# Altium PCB PCB4.PcbDoc
Units mm, origin at the board's own origin, x right, y up, seen from the top; angles counter-clockwise.
Board outline 55 x 45 mm, 4 copper layers (Top Layer, VCC, GND, Bottom Layer), stack 0.651 mm thick; 98 components, 82 nets, 380 pads, 168 vias.
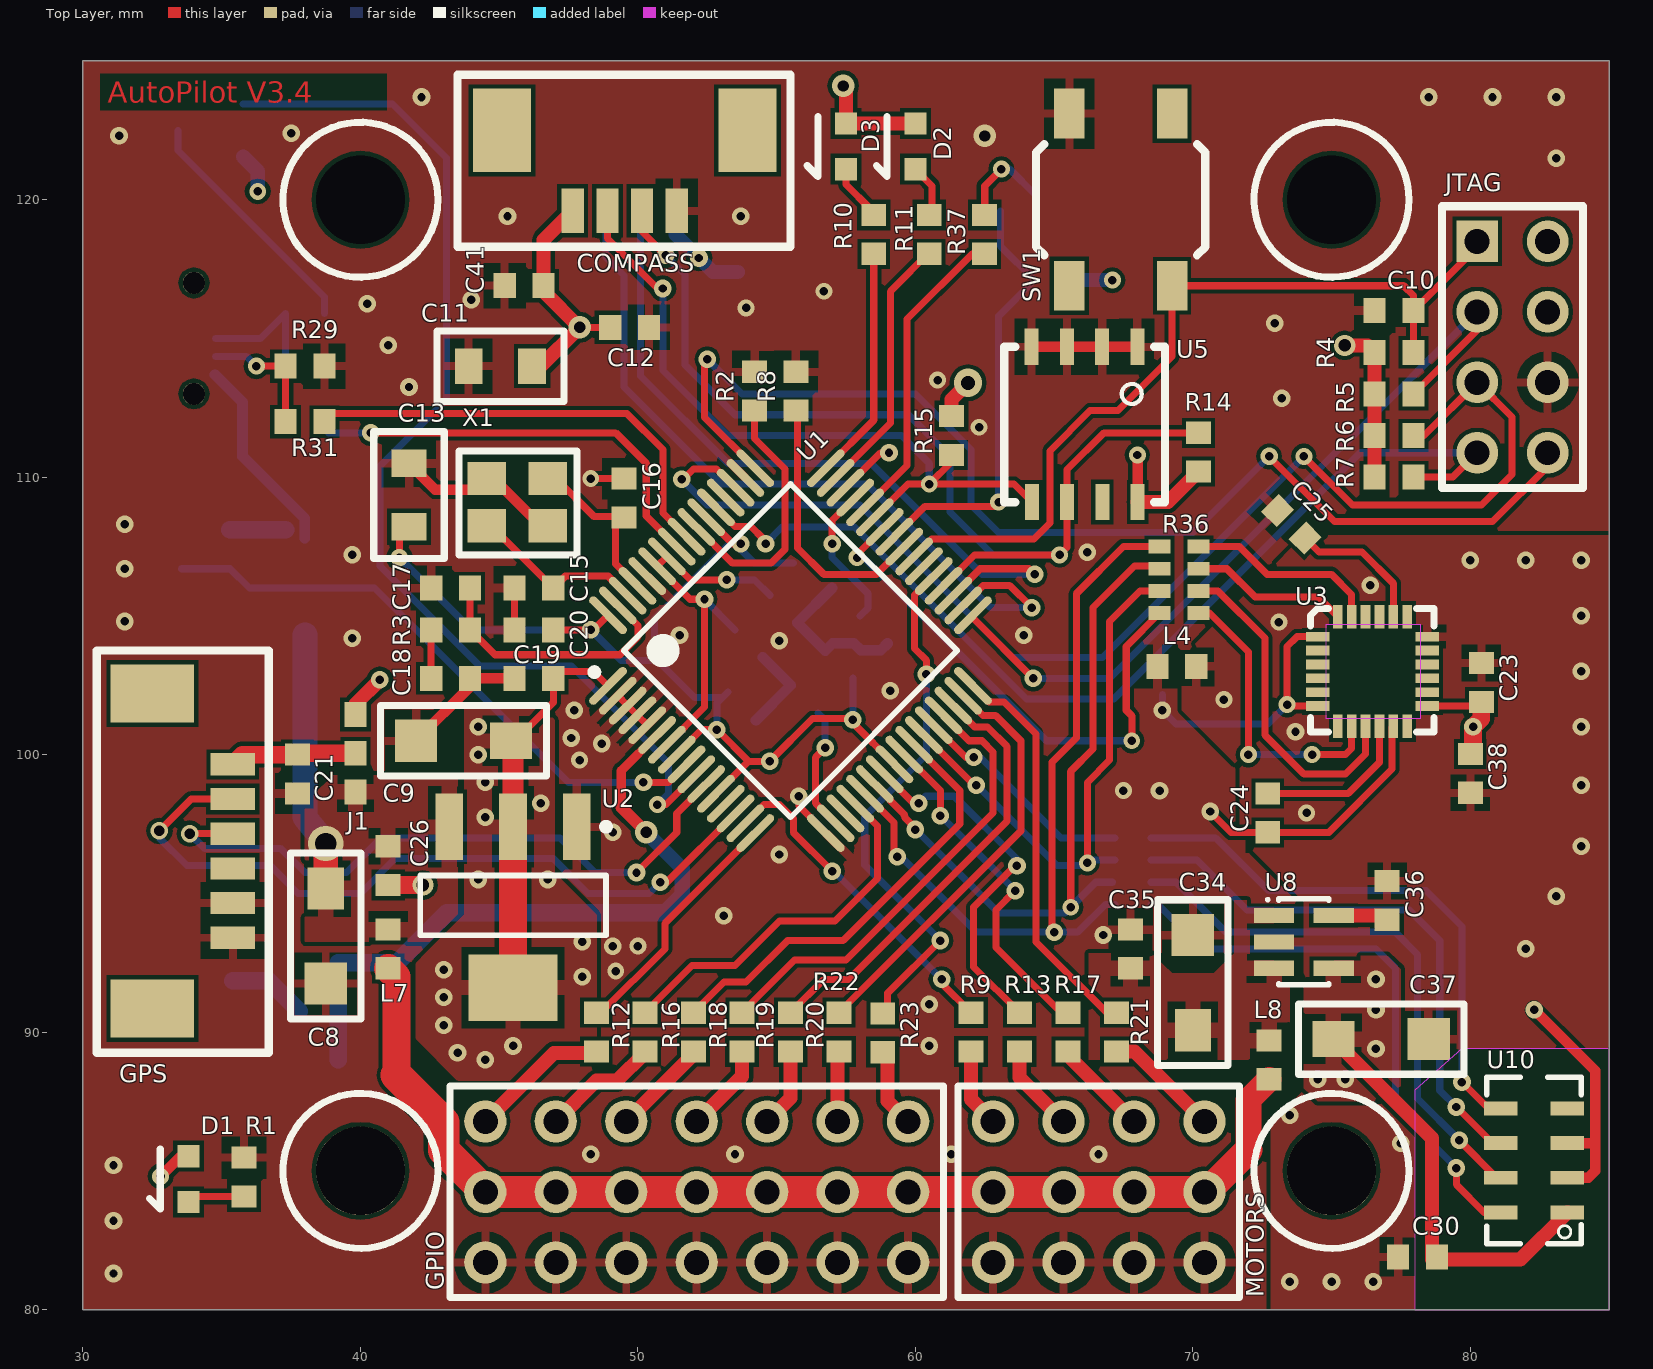
[diagram p0: Top Layer view]
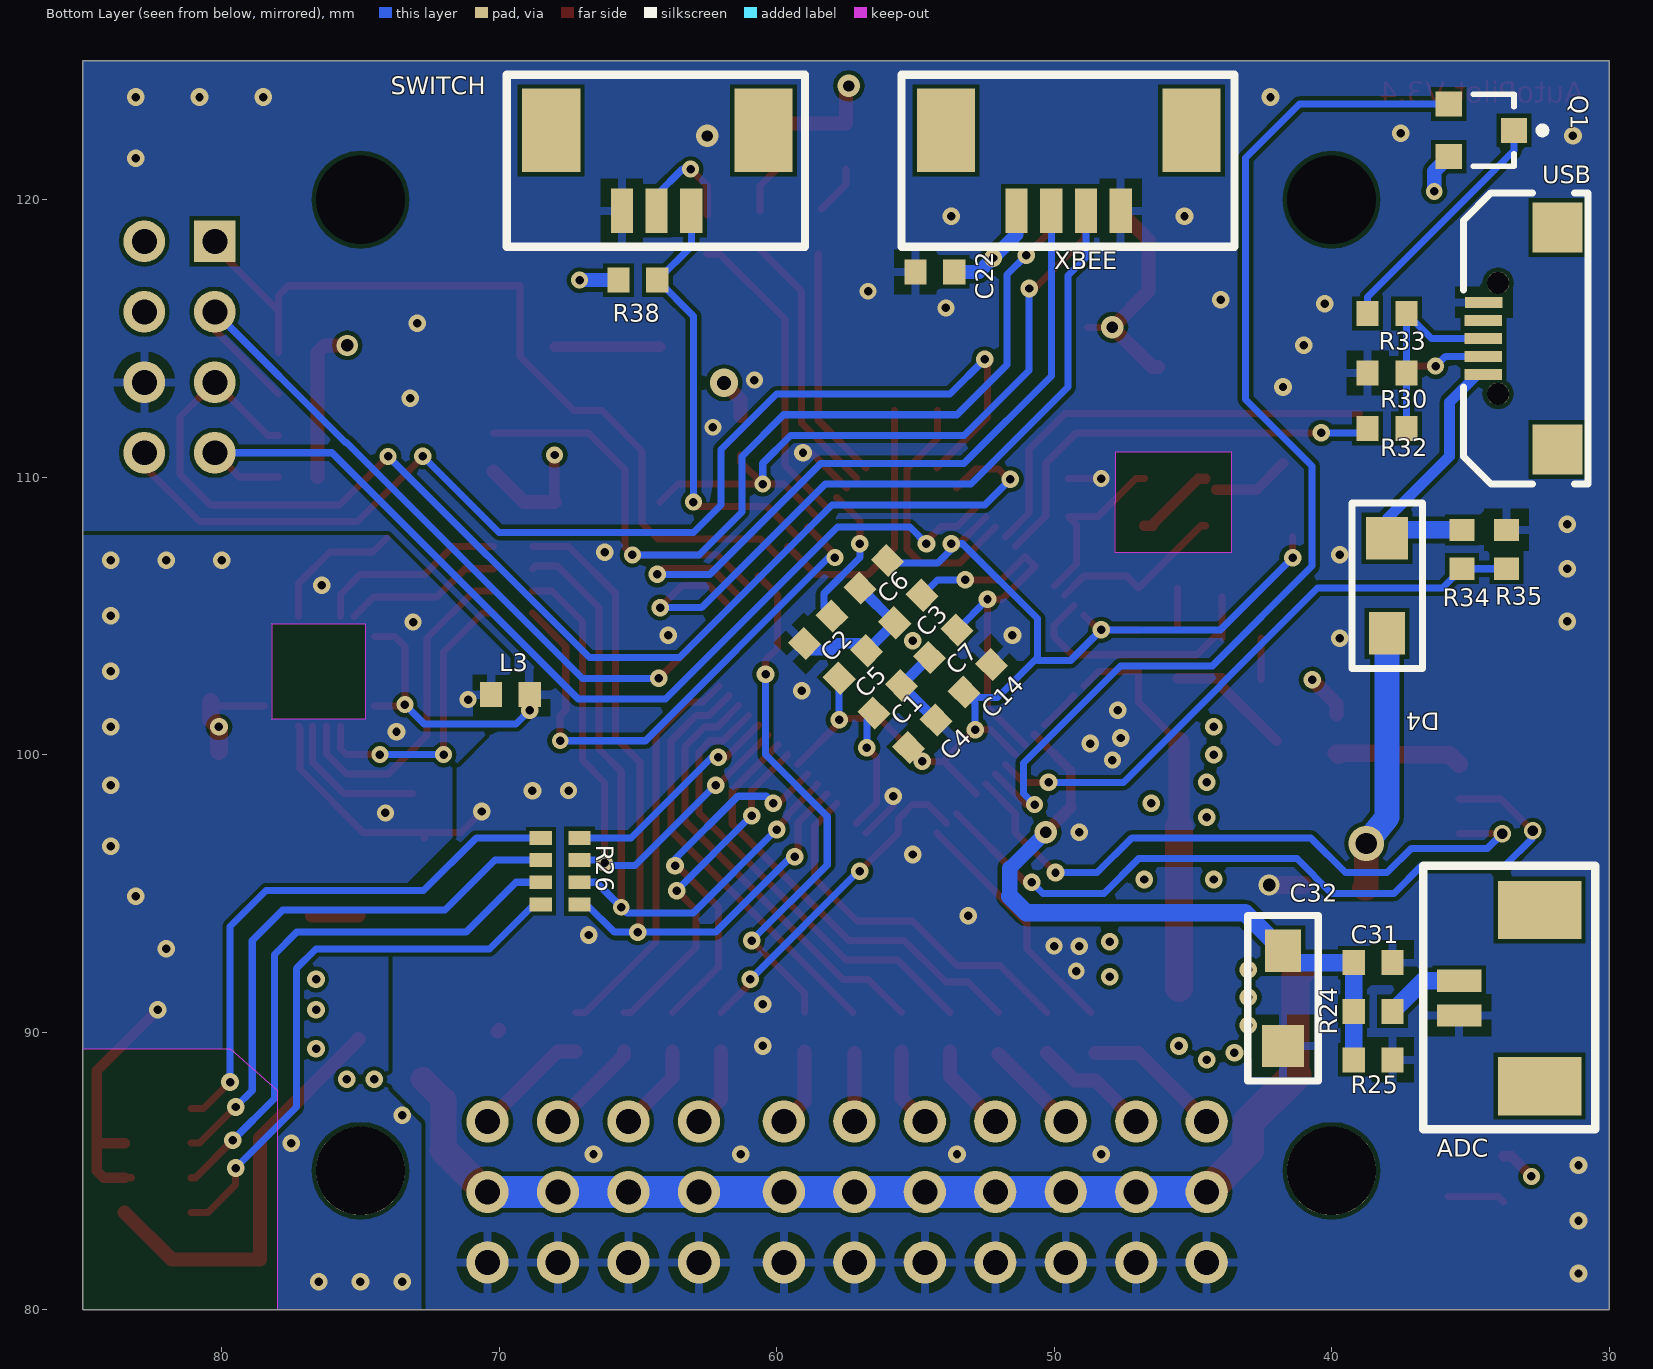
[diagram p1: Bottom Layer view, seen from below]
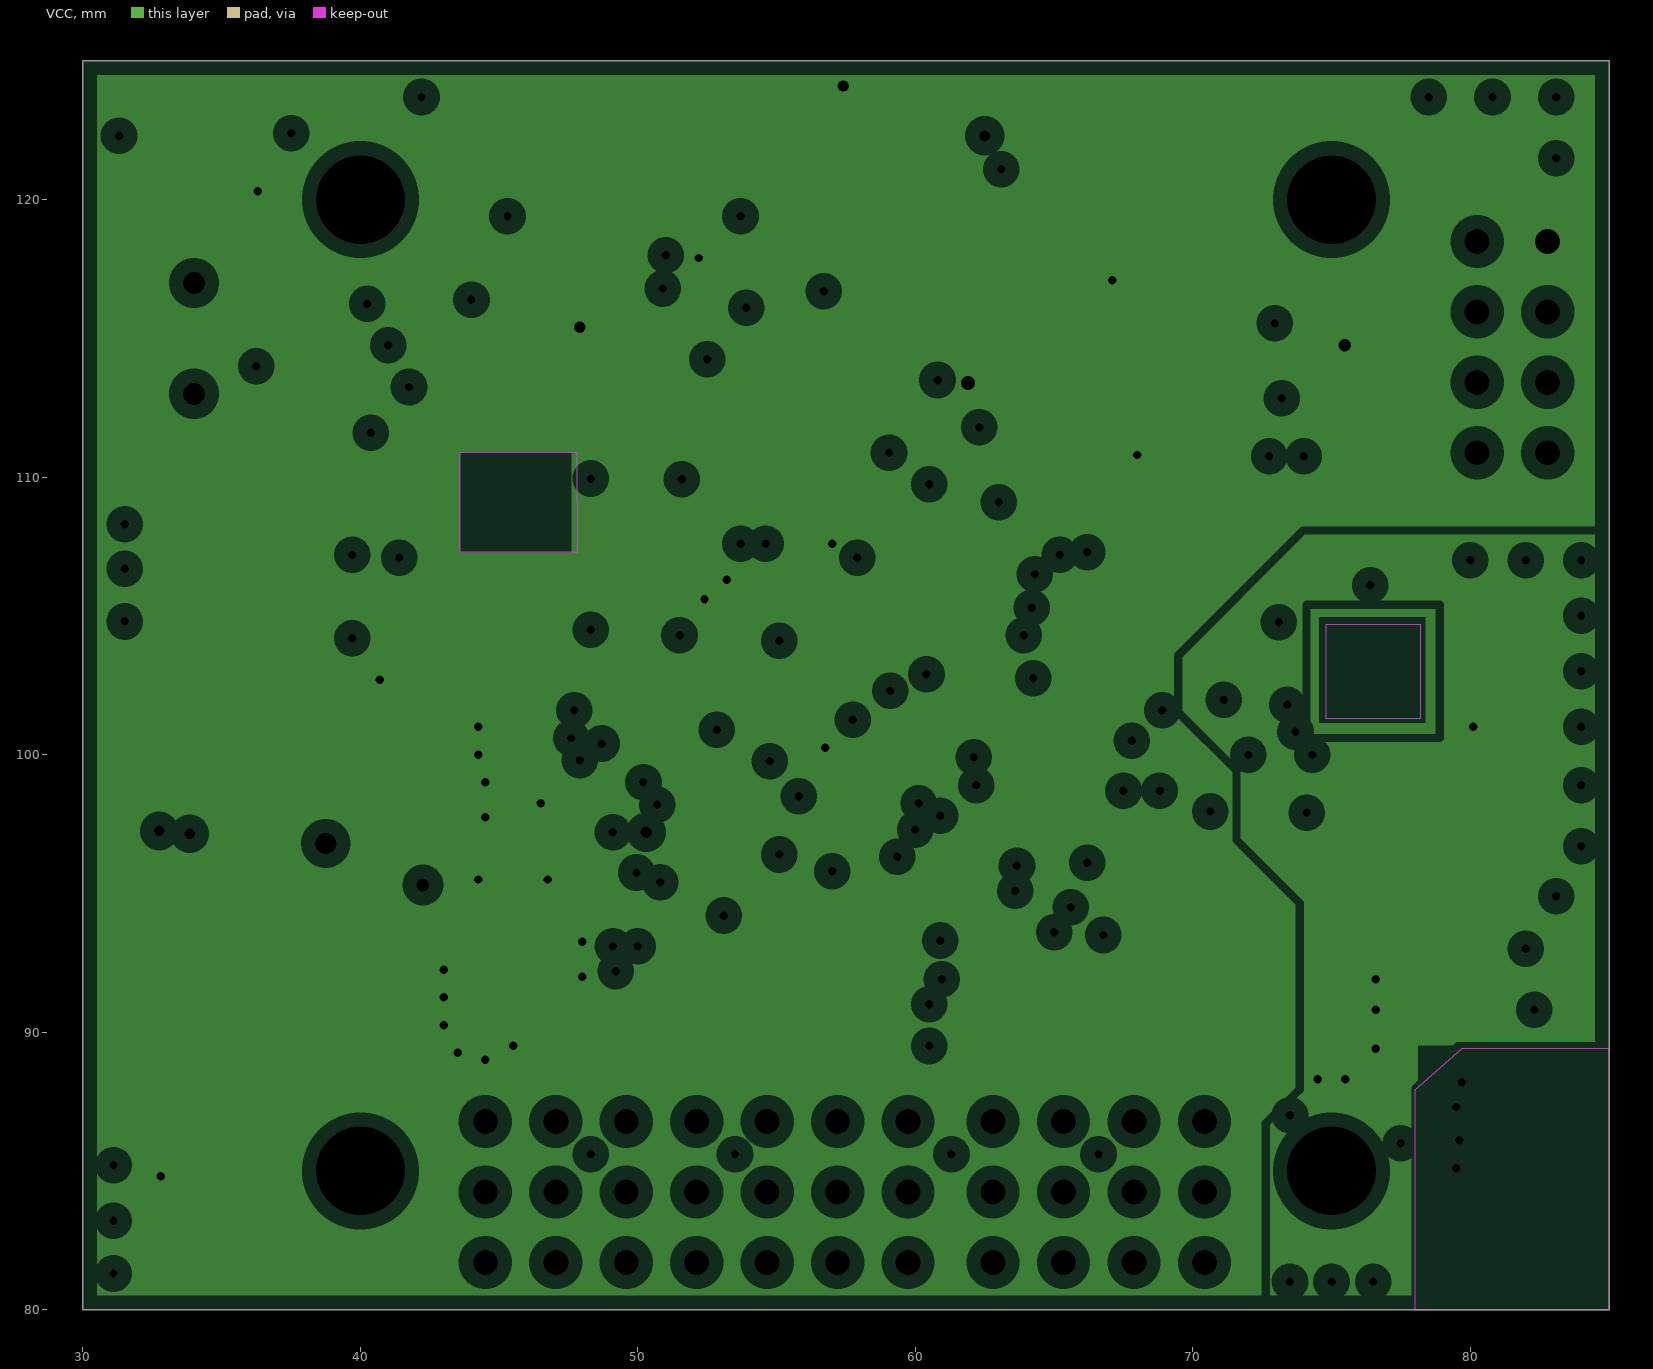
[diagram p2: VCC, clearances drawn from the general rule]
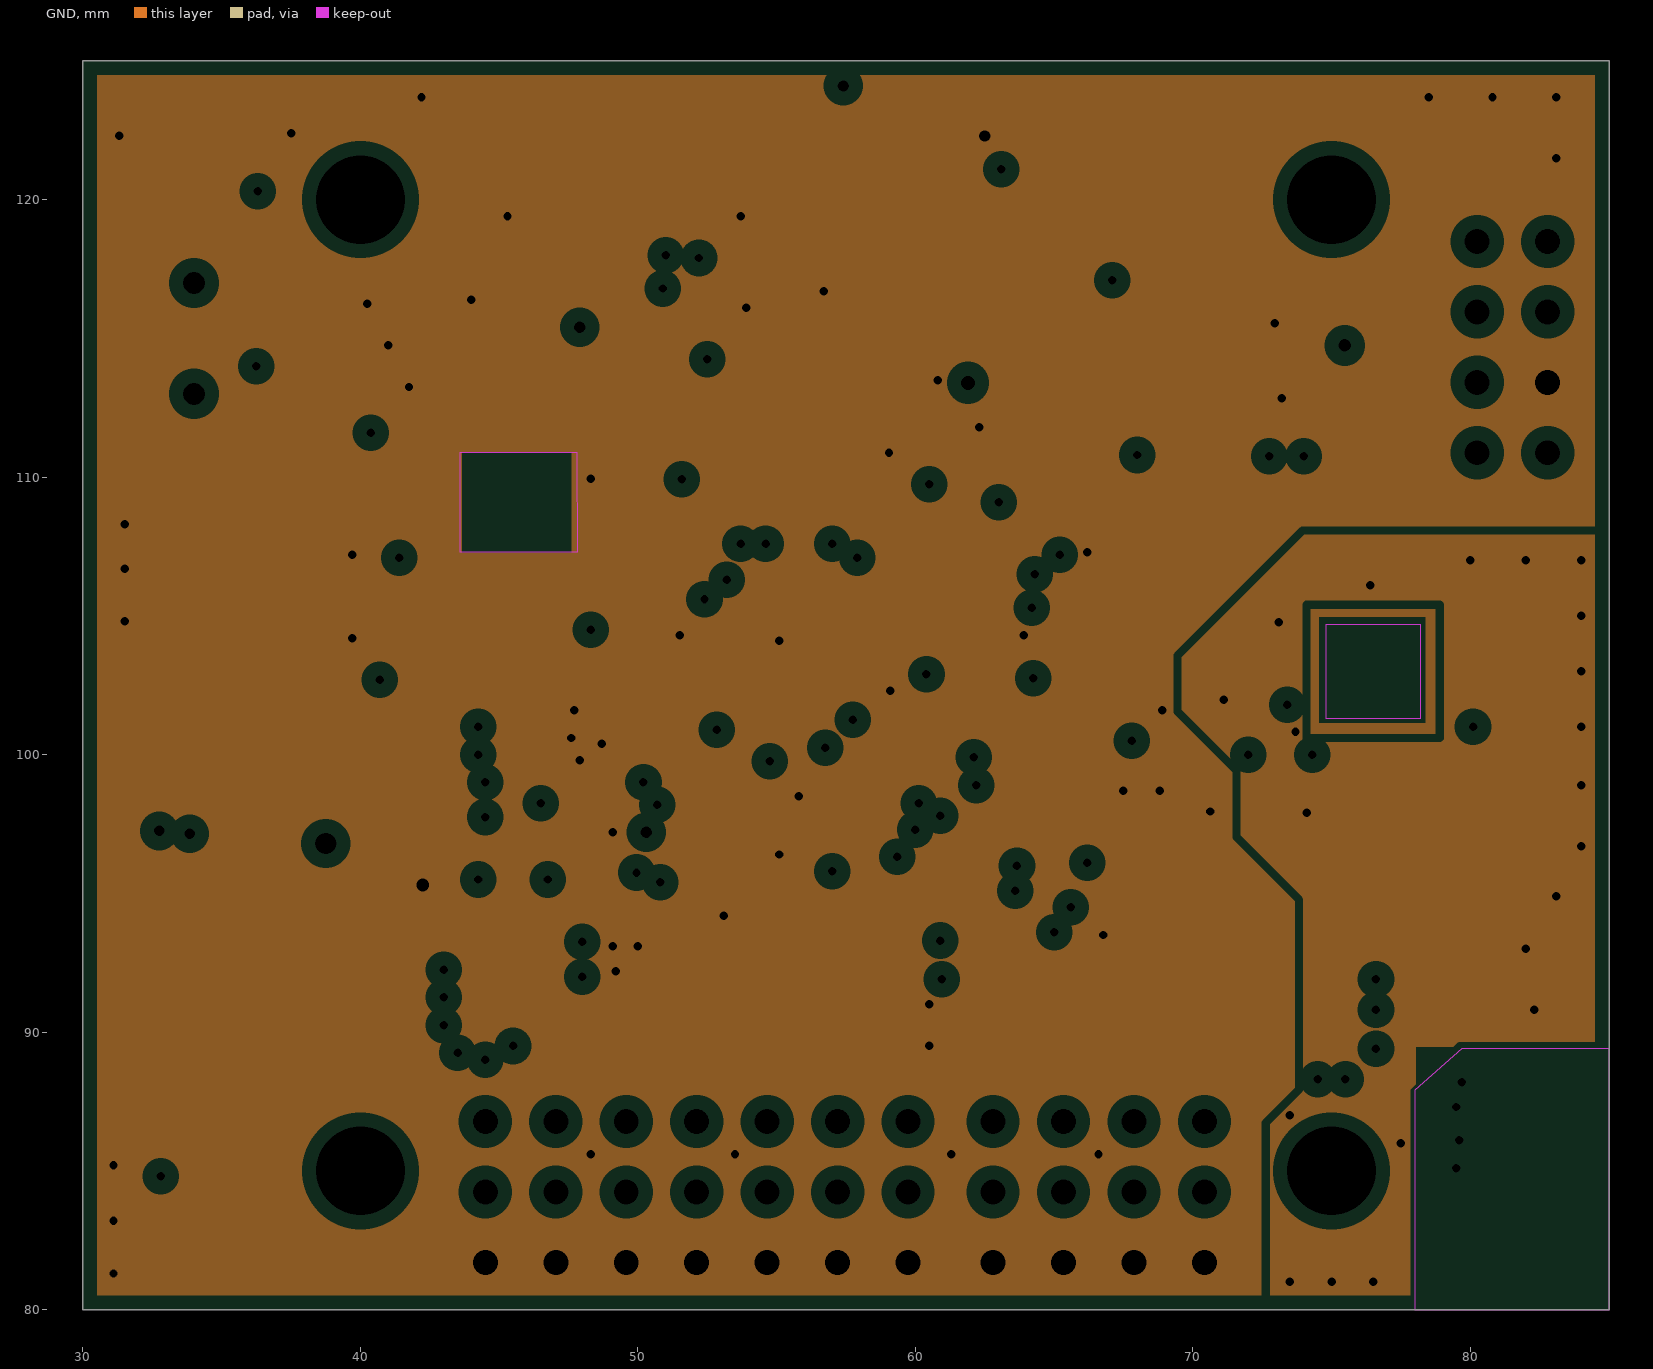
[diagram p3: GND, clearances drawn from the general rule]

## Layer stack, top to bottom
Top Solder: solder mask 0.0102, Solder Resist, Dk 3.5
Top Layer: signal copper 0.0356
Dielectric 1: core 0.127, FR-4, Dk 4.2
VCC: plane copper 0.036, net (Multiple Nets)
Dielectric 3: prepreg 0.127, Dk 4.2
GND: plane copper 0.036, net (Multiple Nets)
Dielectric 2: core 0.254, Dk 4.2
Bottom Layer: signal copper 0.0356
Bottom Solder: solder mask 0.0102, Solder Resist, Dk 3.5

## Board outline
30,80 85,80 85,125 30,125

## Design rules (kind name [scope] priority, off if disabled: settings)
Clearance [All] p1: gap=0.15
PlaneClearance [All] p1: clearance=0.508
PlaneConnect [All] p1: planeconnectstyle=Relief reliefexpansion=0.508 reliefentries=4 reliefconductorwidth=0.559 reliefairgap=0.254
PolygonConnect Via [IsVia] p1: connectstyle=Direct reliefconductorwidth=0.254 reliefentries=4 polygonreliefangle="90 Angle" airgapwidth=0.254
PolygonConnect Track [IsTrack] p2: connectstyle=Direct reliefconductorwidth=0.254 reliefentries=4 polygonreliefangle="90 Angle" airgapwidth=0.254
PolygonConnect GND [InNet('GND')] p3: connectstyle=Relief reliefconductorwidth=0.305 reliefentries=4 polygonreliefangle="90 Angle" airgapwidth=0.356
PolygonConnect AGND [InNet('AGND')] p4: connectstyle=Relief reliefconductorwidth=0.305 reliefentries=4 polygonreliefangle="90 Angle" airgapwidth=0.254
PolygonConnect A3V3 [InNet('A3V3')] p5: connectstyle=Relief reliefconductorwidth=0.559 reliefentries=4 polygonreliefangle="90 Angle" airgapwidth=0.254
PolygonConnect 5Vb [All] p6: connectstyle=Relief reliefconductorwidth=0.559 reliefentries=4 polygonreliefangle="90 Angle" airgapwidth=0.254
PolygonConnect 5Va [InNet('5VA')] p7: connectstyle=Relief reliefconductorwidth=0.559 reliefentries=4 polygonreliefangle="90 Angle" airgapwidth=0.254
PolygonConnect 3.3V [InNet('3.3V')] p8: connectstyle=Relief reliefconductorwidth=0.559 reliefentries=4 polygonreliefangle="90 Angle" airgapwidth=0.254
RoutingVias [All] p1: holewidth=0.711 width=1.27 viastyle="Through Hole" minholewidth=0.711 minwidth=1.27 maxholewidth=0.711 maxwidth=1.27
SolderMaskExpansion [All] p1: expansion=0.102
Width [All] p1: maxlimit=2.54 minlimit=0.254 preferedwidth=0.254
27 further rules are at their usual default settings.

## Components (designator, comment, footprint, x,y, rotation, side; value= is the part's Value field where it differs from the comment)
ADC "AD_Port" 2P_1.25mm（贴片） 31,87 r90 bottom
C1 "0.1u" 1608[0603] 56,102 r315 bottom
C2 "0.1u" 1608[0603] 58.5,104.5 r135 bottom
C3 "0.1u" 1608[0603] 55.25,105.25 r135 bottom
C4 "0.1u" 1608[0603] 54.75,100.75 r315 bottom
C5 "0.1u" 1608[0603] 57.25,103.25 r315 bottom
C6 "0.1u" 1608[0603] 56.5,106.5 r135 bottom
C7 "0.1u" 1608[0603] 54,104 r135 bottom
C8 "10u" 1206 38.75,91.75 r90 top
C9 "10u" 1206 42,100.5 r0 top
C10 "0.01u" 1608[0603] 77.25,116 r0 top
C11 "2.2u" 0805 43.9,114 r0 top
C12 "1n" 1608[0603] 49.7,115.4 r180 top
C13 "4.7u" 0805 41.75,110.5 r270 top
C14 "0.1u" 1608[0603] 52.75,102.75 r315 bottom
C15 "8p" 1608[0603] 46.25,106 r0 top
C16 "8p" 1608[0603] 49.5,109.25 r270 top
C17 "1n" 1608[0603] 43.25,106 r0 top
C18 "10n" 1608[0603] 43.25,102.75 r180 top
C19 "0.1u" 1608[0603] 46.25,102.75 r0 top
C20 "0.1u" 1608[0603] 46.25,104.5 r0 top
C21 "1u" 1608[0603] 37.725,99.3 r90 top
C22 "1u" 1608[0603] 54.3,117.4 r180 bottom
C23 "0.1u" 1608[0603] 80.4,102.6 r270 top
C24 "0.1u" 1608[0603] 72.7,97.9 r90 top
C25 "2.2n" 1608[0603] 73.55,108.3 r315 top
C26 "0.1u" 1608[0603] 41,96 r90 top
C30 "0.1u" 1608[0603] 78.1,81.9 r0 top
C31 "0.1u" 1608[0603] 38.5,92.5 r0 bottom
C32 "10u" 1206 41.75,89.5 r90 bottom
C34 "10u" 1206 70,93.5 r270 top
C35 "0.1u" 1608[0603] 67.75,93 r270 top
C36 "470p" 1608[0603] 77,94.75 r270 top
C37 "10u" 1206 78.5,89.75 r180 top
C38 "2.2u" 1608[0603] 80,99.325 r90 top
C41 "1u" 1608[0603] 45.9,116.9 r0 top
COMPASS "COMPASS" 4P_1.25mm（贴片） 55,124 r180 top
D1 "LED" LED 33.8,85.527 r270 top
D2 "LED" LED 57.5,122.75 r270 top
D3 "LED" LED 60,122.75 r270 top
D4 "Diode" 1206 38,107.8 r270 bottom
GPIO "3*7 PWMin" HEADER3X7 44.5,81.7 r0 top
GPS "GPS" 6P_PH1.25mm（贴片） 31,103.25 r270 top
J1 "0603Jumper" 1-2Jumper 39.825,100.05 r270 top
JTAG "JTAG" JTAG2 80.25,118.5 r0 top
L3 "Ferrite" 1608[0603] 69.6,102.175 r0 bottom
L4 "Ferrite" 1608[0603] 69.425,103.175 r0 top
L7 "" 1608[0603] 41,93 r90 top
L8 "" 1608[0603] 72.75,89 r90 top
MOTORS "3*4P PWMout" header3x4 62.8,81.7 r0 top
Q1 "ZXM61P02F" SOT23 34.6,122.5 r270 bottom
R1 "1K" 1608[0603] 35.8,84.777 r270 top
R2 "10K" 1608[0603] 54.2,113.1 r270 top
R3 "1.5K" 1608[0603] 43.25,104.5 r0 top
R4 "47K" 1608[0603] 77.25,114.5 r180 top
R5 "10K" 1608[0603] 77.25,113 r180 top
R6 "10K" 1608[0603] 77.25,111.5 r180 top
R7 "10K" 1608[0603] 77.25,110 r180 top
R8 "10K" 1608[0603] 55.7,113.1 r270 top
R9 "1K" 1608[0603] 62,90 r270 top
R10 "270R" 1608[0603] 58.5,118.75 r90 top
R11 "270R" 1608[0603] 60.5,118.75 r90 top
R12 "220" 1608[0603] 48.5,90 r270 top
R13 "1K" 1608[0603] 63.75,90 r270 top
R14 "47K" 1608[0603] 70.2,110.9 r270 top
R15 "47K" 1608[0603] 61.3,111.5 r90 top
R16 "220" 1608[0603] 50.25,90 r270 top
R17 "1K" 1608[0603] 65.5,90 r270 top
R18 "220" 1608[0603] 52,90 r270 top
R19 "220" 1608[0603] 53.75,90 r270 top
R20 "220" 1608[0603] 55.5,90 r270 top
R21 "1K" 1608[0603] 67.25,90 r270 top
R22 "220" 1608[0603] 57.25,90 r270 top
R23 "220" 1608[0603] 58.825,89.975 r270 top
R24 "200K" 1608[0603] 38.5,90.75 r180 bottom
R25 "470K" 1608[0603] 38.5,89 r0 bottom
R26 "100R*4" Resistances 68.5,97 r270 bottom
R29 "330K" 1608[0603] 38,114 r0 top
R30 "330K" 1608[0603] 38,113.75 r0 bottom
R31 "22R" 1608[0603] 38,112 r0 top
R32 "22R" 1608[0603] 38,111.75 r0 bottom
R33 "1.5K" 1608[0603] 38,115.9 r180 bottom
R34 "27K" 1608[0603] 35.3,107.4 r270 bottom
R35 "47K" 1608[0603] 33.7,107.4 r270 bottom
R36 "100R*4" ResPack 70.2,105.1 r90 top
R37 "1K" 1608[0603] 62.5,118.75 r270 top
R38 "47K" 1608[0603] 65,117.1 r0 bottom
SW1 "Push Button" switch 69.75,116 r90 top
SWITCH "Safe_button" 3P_1.25mm（贴片） 58.225,124 r0 bottom
U1 "AT91SAM7S256-AU-001" LQFP64_N 55.5,103.75 r45 top
U2 "LM1117N33" SOT230P700X180-4N 45.5,94.5 r270 top
U3 "MPU6000" LGANEW 74.5,104.25 r0 top
U5 "EEPROM" EEPROM 68,114.7 r180 top
U8 "MIC5207LE33" S5 74,93.25 r270 top
U10 "MS5611" MS_5611 83.5,83.5 r180 top
USB "USB_Receptacle" micro_usb 34,113 r180 bottom
X1 "" OSC2 44.55,109.95 r0 top
XBEE "XBEE" 4P_1.25mm（贴片） 44,124 r0 bottom

## Footprints (in the part's own frame and the unit in brackets; to place one, negate y for a bottom-side part, rotate by r counter-clockwise, add the part's x,y. Pads: shape width x height; smd on the part's side, far side on the other; paste and mask are expansions set on the pad)
1-2Jumper [mm]
  rect 0.9x0.8 smd: 1(0,0) 2(1.4,0) 3(-1.4,0)
2P_1.25mm（贴片） [mm]
  rect 2.1x3 smd: 0(1.05,1.5) 5(7.4,1.5)
  rect 0.8x1.6 smd: 1(4.85,4.4) 2(3.6,4.4)
  silkscreen extent -0.5,-0.5 9,5.7
3P_1.25mm（贴片） [mm]
  rect 2.1x3 smd: 0(2.25,1.5) 5(9.9,1.5)
  rect 0.8x1.6 smd: 1(7.35,4.4) 2(6.1,4.4) 3(4.85,4.4)
  silkscreen extent 0.75,-0.5 11.5,5.7
4P_1.25mm（贴片） [mm]
  rect 2.1x3 smd: 0(1.05,1.5) 5(9.9,1.5)
  rect 0.8x1.6 smd: 1(7.35,4.4) 2(6.1,4.4) 3(4.85,4.4) 4(3.6,4.4)
  silkscreen extent -0.5,-0.5 11.5,5.7
6P_PH1.25mm（贴片） [mm]
  rect 2.1x3 smd: 0(1.05,1.5) 7(12.4,1.5)
  rect 0.8x1.6 smd: 1(3.6,4.4) 2(4.85,4.4) 3(6.1,4.4) 4(8.6,4.4) 4(9.85,4.4) 5(7.35,4.4)
  silkscreen extent -0.5,-0.5 14,5.7
0805 [mm]
  rect 1x1.27 smd: 1(0,0) 2(2.286,0)
  silkscreen extent -1.14,-1.27 3.43,1.27
1206 [mil]
  rect 60x60 smd: 1(0,0)
  rect 60x51.18 smd: 2(135,0)
  silkscreen extent -50,-50 185,50
1608[0603] [mm] "Chip Capacitor, Body 1.6x0.8mm, IPC High Density"
  rect 0.8x0.9 smd: 1(-0.7,0) 2(0.7,0)
  body extent -0.87,-0.47 0.87,0.47, height 1.3
EEPROM [mm]
  rect 0.5x1.3 smd: 1(0,0) 2(1.27,0) 3(2.54,0) 4(3.81,0) 5(3.8,5.6) 6(2.53,5.6) 7(1.26,5.6) 8(-0.01,5.6)
  silkscreen extent -1,0 4.8,5.6
header3x4 [mil]
  round 60 hole 35.43: 1(0,0) 2(0,100) 3(0,200) 4(100,0) 5(100,100) 6(100,200) 7(200,0) 8(200,100) 9(200,200) 10(300,0) 11(300,100) 12(300,200)
  silkscreen extent -50,-50 350,250
HEADER3X7 [mil]
  round 60 hole 35.43: 1(0,0) 2(0,100) 3(0,200) 4(100,0) 5(100,100) 6(100,200) 7(200,0) 8(200,100) 9(200,200) 10(300,0) 11(300,100) 12(300,200) 13(400,0) 14(400,100) 15(400,200) 16(500,0) 17(500,100) 18(500,200) 19(600,0) 20(600,100) 21(600,200)
  silkscreen extent -50,-50 650,250
JTAG2 [mm]
  rect 1.5x1.5 hole 0.9: 1(0,0)
  round 1.5 hole 0.9: 2(0,-2.54) 3(0,-5.08) 4(0,-7.62) 5(2.54,0) 6(2.54,-2.54) 7(2.54,-5.08) 8(2.54,-7.62)
  silkscreen extent -1.27,-8.89 3.81,1.27
LED [mm]
  rect 0.8x0.8 smd: 1(0,0) 2(1.65,0)
  silkscreen extent -0.25,-1.4 1.9,-1.02
LGANEW [mm]
  rect 0.85x0.35 smd mask+0: 1(0,0) 2(0,-0.5) 3(0,-1) 4(0,-1.5) 5(0,-2) 6(0,-2.5) 13(3.95,-2.5) 14(3.95,-2) 15(3.95,-1.5) 16(3.95,-1) 17(3.95,-0.5) 18(3.95,0)
  rect 0.35x0.85 smd mask+0: 7(0.725,-3.225) 8(1.225,-3.225) 9(1.725,-3.225) 10(2.225,-3.225) 11(2.725,-3.225) 12(3.225,-3.225) 19(3.225,0.725) 20(2.725,0.725) 21(2.225,0.725) 22(1.725,0.725) 23(1.225,0.725) 24(0.725,0.725)
  silkscreen extent -0.25,-3.43 4.19,1.02
LQFP64_N [mm] "Thin QFP, 64-Leads, Body 10x10mm, Pitch 0.5mm, IPC Medium Density"
  oval 1.8x0.3 smd: 1(-5.55,3.75) 2(-5.55,3.25) 3(-5.55,2.75) 4(-5.55,2.25) 5(-5.55,1.75) 6(-5.55,1.25) 7(-5.55,0.75) 8(-5.55,0.25) 9(-5.55,-0.25) 10(-5.55,-0.75) 11(-5.55,-1.25) 12(-5.55,-1.75) 13(-5.55,-2.25) 14(-5.55,-2.75) 15(-5.55,-3.25) 16(-5.55,-3.75) 33(5.55,-3.75) 34(5.55,-3.25) 35(5.55,-2.75) 36(5.55,-2.25) 37(5.55,-1.75) 38(5.55,-1.25) 39(5.55,-0.75) 40(5.55,-0.25) 41(5.55,0.25) 42(5.55,0.75) 43(5.55,1.25) 44(5.55,1.75) 45(5.55,2.25) 46(5.55,2.75) 47(5.55,3.25) 48(5.55,3.75)
  oval 0.3x1.8 smd: 17(-3.75,-5.55) 18(-3.25,-5.55) 19(-2.75,-5.55) 20(-2.25,-5.55) 21(-1.75,-5.55) 22(-1.25,-5.55) 23(-0.75,-5.55) 24(-0.25,-5.55) 25(0.25,-5.55) 26(0.75,-5.55) 27(1.25,-5.55) 28(1.75,-5.55) 29(2.25,-5.55) 30(2.75,-5.55) 31(3.25,-5.55) 32(3.75,-5.55) 49(3.75,5.55) 50(3.25,5.55) 51(2.75,5.55) 52(2.25,5.55) 53(1.75,5.55) 54(1.25,5.55) 55(0.75,5.55) 56(0.25,5.55) 57(-0.25,5.55) 58(-0.75,5.55) 59(-1.25,5.55) 60(-1.75,5.55) 61(-2.25,5.55) 62(-2.75,5.55) 63(-3.25,5.55) 64(-3.75,5.55)
  silkscreen extent -5.67,-4.25 4.25,4.57, body extent -5,-5 5,5, height 1.6
micro_usb [mm]
  rect 1.35x0.4 smd: 1(-0.525,0.7) 2(-0.525,1.35) 3(-0.525,2) 4(-0.525,2.65) 5(-0.508,3.302)
  rect 1.8x1.8 smd: 6(2.15,-2) 6(2.15,6)
  round 0.8 hole 0.8: 18(0,0) 19(0,4)
  silkscreen extent -1.25,-3.25 3.25,7.25
MS_5611 [mm]
  rect 1.2x0.5 smd: 1(0,0) 2(0,-1.25) 3(0,-2.5) 4(0,-3.75) 5(2.4,-3.75) 6(2.4,-2.5) 7(2.4,-1.25) 8(2.4,0)
  silkscreen extent -0.5,-4.88 2.9,1.13
OSC2 [mm]
  rect 1.4x1.2 smd: 1(0,-1.7) 2(2.2,-1.7) 3(2.2,0) 4(0,0)
  silkscreen extent -1,-2.75 3.25,1
Resistances [mm]
  rect 0.5x0.8 smd: 1(0,0) 2(0.8,0) 3(1.6,0) 4(2.4,0) 5(2.4,1.4) 6(1.6,1.4) 7(0.8,1.4) 8(0,1.4)
ResPack [mm]
  rect 0.5x0.8 smd: 1(0,0) 2(0.8,0) 3(1.6,0) 4(2.4,0) 5(2.4,1.4) 6(1.6,1.4) 7(0.8,1.4) 8(0,1.4)
S5 [mm] "SOT-23/SC-74A; 5 Leads; Body 3.1 x 3 mm, inc. leads (LxW max)"
  rect 0.55x1.45 smd: 1(-0.95,-1.075) 2(0,-1.075) 3(0.95,-1.075) 4(0.95,1.075) 5(-0.95,1.075)
  silkscreen extent -1.57,-1.35 1.55,0.9
SOT23 [mm] "SOT-23; 3 Leads; Body 3.1 x 2.5 mm, inc. leads (LxW max), Alternate Lead Configuration"
  rect 0.9x0.95 smd: 1(0,1.175) 2(0.95,-1.175) 3(-0.95,-1.175)
  silkscreen extent -1.3,-0.3 1.3,2.32
SOT230P700X180-4N [mm] "SOT223, 4-Leads, Body 6.50x7.00mm (avg), Pitch 2.30mm, IPC Medium Density"
  rect 2.4x1 smd: 1(-2.9,2.3) 2(-2.9,0) 3(-2.9,-2.3)
  rect 2.4x3.2 smd: 4(2.9,0)
  silkscreen extent -3.02,-3.35 1.02,3.48, body extent -1.85,-3.35 1.85,3.35, height 1.8
switch [mm]
  rect 1.8x1.1 smd: 1(0.9,4.2) 2(7.1,4.2) 3(0.9,0.5) 4(7.1,0.5)
  silkscreen extent 2,-0.7 6,5.4

## Part data
C1 C2 C3 C4 C5 C6 C7 C10 C12 C14 C15 C16 C17 C18 C19 C20 C21 C22 C23 C24 C25 C30 C31 C35 C36 C37 C38 C41: library part "Cap 0603", "0603 Capacitor"
C8 C9 C26 C32 C34: library part "Cap 1206", "1206 Capacitor"
C11 C13: library part "Cap 0805", "0805 Capacitor"
COMPASS GPS XBEE: "Header, 4-Pin"
D1 D2 D3: "Typical RED, GREEN, YELLOW, AMBER GaAs LED"
D4: "Default Diode"
GPIO: library part MyPWMin
JTAG: library part JTAG2
L3 L4 L7 L8: library part Inductor, "Inductor"
MOTORS: library part MyPWMout
Q1: "20V P-Channel Enhancement Mode MOSFET"
R1 R2 R3 R4 R5 R6 R7 R8 R9 R10 R11 R12 R13 R14 R15 R16 R17 R18 R19 R20 R21 R22 R23 R24 R25 R29 R30 R31 R32 R33 R34 R35 R37 R38: library part "Res 0603", "Resistor"
R26 R36: library part "Res Pack4", "Isolated Resistor Network"
U1: "AT91 ARM Thumb-based 32-bit Microcontroller, 256KB Flash, 64KB SRAM, 64-Pin LQFP, 11-ch. PDC, Industrial Grade (-40癈 to 85癈), Pb-Free"
U2: library part LM1117S33, "3.3V Regulator"
U5: library part ROM
U8: library part MIC5207
X1: library part OSC2

## Free pads (board coordinates)
  round 3.2 hole 3.2 unplated: 0(40,85) 1(75,85)
  round 3 hole 3.2 unplated: 2(75,120) 3(40,120)

## Via types
v1: diameter 0.635, hole 0.305, Top Layer to Bottom Layer, 128 vias
v2: diameter 0.61, hole 0.305, Top Layer to Bottom Layer, 30 vias
v3: diameter 0.813, hole 0.406, Top Layer to Bottom Layer, 4 vias
v4: diameter 0.762, hole 0.457, Top Layer to Bottom Layer, 2 vias
v5: diameter 0.635, hole 0.381, Top Layer to Bottom Layer, 2 vias
v6: diameter 1.016, hole 0.508, Top Layer to Bottom Layer, 1 vias
v7: diameter 1.27, hole 0.762, Top Layer to Bottom Layer, 1 vias

## Nets (pads, with @x,y where several pads share a name; then routed paths per layer and width w, separated by ;. In a path a pad name is that pad's centre, name@x,y a point inside that pad or via, vN(x,y) a via of type N, cw(c..) or ccw(c..) an arc to the next point about the centre after c; other vN are vias at no path point)
3.3V: C1.2 C2.2 C3.2 C7.2 C9.2 C11.2 C12.2 C19.2 C22.2 C41.2 COMPASS.1 D1.1 D2.1 D3.1 J1.3 JTAG.5 Q1.2 R4.2 R5.2 R6.2 R7.2 R14.2 R15.2 R38.2 U1.1 U1.7 U1.18 U1.45 U1.58 U1.59 U2.2 U2.4 U5.8 XBEE.1 | length 71.5
  Top Layer w0.254: C9.2@45.5,100.429 46.95,101.879 46.95,103 48.401,103 U1.1 ; v3(47.9,115.4) C12.2@48.8,115.4 ; U1.7 52.4,101.711 v1(52.4,105.6) 51.882,105.6 U1.59 U1.58 51.889,106.3 v1(53.2,106.3) ; v1(56.75,100.25) 56.404,99.904 56.404,98.25 U1.18 ; v1(57,107.6) 57,108.432 U1.45
  Top Layer w0.381: v2(32.8,84.8) 33.527,85.527 D1.1 ; U5.8 v2@68.01,110.79
  Top Layer w0.508: J1.3 39.825,101.825 v1(40.7,102.7) ; C11.2@46.25,113.964 46.464,113.964 v3(47.9,115.4) 46.6,116.7 C41.2 46.6,118.55 COMPASS.1 ; v3(57.4,124.1) 57.5,124 D2.1 D3.1 ; R15.2 61.3,112.8 v6(61.9,113.4) ; U5.8 69.1,109.1 R14.2 ; v4(75.475,114.75) 76.3,114.75 R4.2 R5.2 R6.2 R7.2
  Top Layer w0.762: U2.2 C9.2@45.5,100.429
  Top Layer w1.016: U2.4 U2.2
  Bottom Layer w0.254: v1(52.4,105.6) C7.2 ; v1(53.2,106.3) 54.2,106.3 C3.2 ; C1.2 56.75,101.25 v1(56.75,100.25) ; v1(57,107.6) 57,107.1 58.3,105.8 58.3,105.29 C2.2
  Bottom Layer w0.508: Q1.2 36.3,121.025 v2(36.3,120.3) ; XBEE.1 51.35,118.75 v1(52.2,117.9) 52.7,117.4 C22.2 ; R38.2 v2(67.1,117.1)
  other v1: 44.5,89 43.5,89.25 45.5,89.5 43,90.25 43,91.25 48,92 43,92.25 48,93.25 44.25,95.5 46.75,95.5 44.5,97.75 46.5,98.25 44.5,99 44.25,100 44.25,101
  other v2: 68,110.8
5VA: C34.2 C35.2 L8.2 U8.1 U8.3 | length 0.1
  Top Layer w0.508: C34.2 C34.2@70.05,90.021
5VB: C8.2 C26.2 D4.2 J1.2 L7.2 U2.3 | length 9.5
  Top Layer w0.889: v7(38.75,96.8) C8.2 C8.2@38.821,95.179
  Bottom Layer w0.889: D4.2@38,104.321 38,103.971 38,97.75 v7(38.75,96.8)
A3V3: C23.2 C30.2 C37.2 C38.2 U3.13 U8.4 U10.1 | length 18.7
  Top Layer w0.254: U3.13 C23.2@80.25,101.75
  Top Layer w0.508: C37.2@75.075,89.754 C37.2 75.071,89.729 78.625,86.175 78.625,81.8 81.8,81.8 U10.1
  Top Layer w0.635: C38.2@80.1,100.125 v1(80.1,101) 80.4,101.3 C23.2
  other v1: 74.5,88.3 75.5,88.3 76.6,89.4 76.6,90.8 76.6,91.9
AD7: C31.2 C32.2 R24.1 R25.2 U1.6 | length 24.1
  Top Layer w0.305: 49.4,99.418 U1.6
  Top Layer w0.356: 49.4,98.1 49.4,99.418
  Top Layer w0.432: 49.4,98.1 v3(50.3,97.2)
  Bottom Layer w0.508: v3(50.3,97.2) 51.6,95.9
  Bottom Layer w0.559: 51.6,94.9 51.6,95.9
  Bottom Layer w0.635: R25.2 R24.1 C31.2 41.321,92.5 C32.2 43.121,94.3 51,94.3 51.6,94.9
"AD PORT": ADC.1 R24.2 | length 2.9
  Bottom Layer w0.635: ADC.1 36.7,91.85 R24.2
AGND: C23.1 C30.1 C36.1 C37.1 C38.1 L3.2 L4.2 U3.18 U8.2 U10.2 U10.3 | length 9.1
  Top Layer w0.254: U10.2@83.25,84.75 U10.2
  Top Layer w0.381: v1(82.3,90.8) 84.5,88.6 84.5,86 ; U10.2 84.25,84.75 84.5,85 84.5,86 ; U10.3 84.5,86
  other v1: 73.5,81 75,81 76.5,81 77.5,86 73.5,87 82,93 83.1,94.9 84,96.7 84,98.9 73.7,100.825 84,101 84,103 84,105 76.4,106.1 80,107 82,107 84,107
  other v2: 74.1,97.9 71.12,101.981 73.1,104.775
BUTTON: R38.1 SWITCH.3 U1.41 | length 15.6
  Top Layer w0.254: U1.41 60.346,108.95 v2@62.85,108.95
  Bottom Layer w0.254: v2(63,109.1) 63,115.8 R38.1 63.075,118.325 SWITCH.3
CS0: R26.8 U1.28 | length 8.2
  Top Layer w0.254: U1.28 61.825,99.9 v1(62.1,99.9)
  Bottom Layer w0.254: v1(62.1,99.9) 62.35,99.9 65.25,97 R26.8@67.2,97
CS2: R36.8 U1.42 | length 19.3
  Top Layer w0.254: v2(57.9,107.1) 57.9,107.211 U1.42 ; v2(67.8,100.5) 67.8,101.4 67.6,101.6 67.6,103.9 R36.8
  Bottom Layer w0.254: v2(57.9,107.1) 58.125,107.1 64.725,100.5 v2(67.8,100.5)
DDM: R31.2 U1.56 | length 15.9
  Top Layer w0.254: R31.2@39,112.3 49.6,112.3 50.9,111 50.9,108.704 U1.56
DDP: R32.2 U1.57 | length 15.7
  Top Layer w0.254: v1(40.375,111.6) 49.2,111.6 50.3,110.5 50.3,108.596 U1.57
  Bottom Layer w0.254: R32.2 R32.2@38.95,112 ; R32.2@38.85,111.6 v1(40.375,111.6)
ERASE: R2.2 U1.55 | length 9.4
  Top Layer w0.254: U1.55 53.411,106.9 54.8,106.9 55.3,107.4 55.3,110.3 54.2,111.4 R2.2
GND: ADC.2 C1.1 C2.1 C3.1 C4.1 C5.1 C6.1 C7.1 C8.1 C9.1 C10.1 C11.1 C12.1 C13.1 C14.1 C15.1 C16.1 C17.1 C18.1 C19.1 C20.1 C21.1 C22.1 C24.1 C25.1 C26.1 C31.1 C32.1 C34.1 C35.1 C41.1 COMPASS.4 GPIO.1 GPIO.4 GPIO.7 GPIO.10 GPIO.13 GPIO.16 GPIO.19 GPS.4 JTAG.7 L3.1 L4.1 MOTORS.1 MOTORS.4 MOTORS.7 MOTORS.10 R1.1 R2.1 R8.1 R25.1 R29.2 R30.2 R35.1 SW1.2 SWITCH.1 U1.2 U1.3 U1.4 U1.5 U1.17 U1.46 U1.50 U1.60 U2.1 U3.1 U3.6 U3.11 U5.1 U5.2 U5.3 U5.4 USB.5 X1.2 X1.4 XBEE.4 | length 52
  Top Layer w0.254: C20.1 C15.1 ; v2(48.3,109.95) C16.1 ; U1.2 U1.3 U1.4 U1.5 ; v1(55.8,98.5) 55.8,98.147 U1.17 ; U1.46 58.736,110.875 v1(59.05,110.875) ; v1(70.625,97.95) 71.375,97.2 C24.1 ; C24.1@72.7,97 C24.1 ; v2(73.4,101.8) 73.4,103.9 73.75,104.25 U3.1 ; v2@73.45,101.75 U3.6 ; U3.11 77.177,100.977 77.177,99.477 74.9,97.2 C24.1
  Top Layer w0.381: C13.1 42.7,109.55 X1.4@44.15,109.55 ; C9.1 43.95,102.45 C18.1 C19.1 ; X1.4 44.8,109.95 46.45,108.3 46.45,108.25 X1.2 ; U5.4 U5.3 U5.2 U5.1
  Top Layer w0.635: C26.1 v4(42.25,95.3)
  Bottom Layer w0.254: L3.1 v1(68.9,101.6) 69.4,101.1 72.7,101.1 v2(73.4,101.8)
  Bottom Layer w0.381: C4.1 C1.1 C7.1 ; C6.1 C3.1 C5.1 57.023,104.013 57.785,104.013 58.039,103.759 58.749,103.759 C2.1
  other v1: 31.1,81.3 31.1,83.2 31.1,85.2 48.3,85.6 53.5,85.6 61.3,85.6 66.6,85.6 60.5,89.5 60.5,91 49.1,93.1 66.775,93.5 53.1,94.2 55.1,96.4 49.1,97.2 68.8,98.7 48.7,100.4 47.6,100.6 47.7,101.6 59.1,102.3 55.1,104.1 39.7,104.2 51.5,104.3 63.9,104.3 31.5,104.8 31.5,106.7 39.7,107.2 66.2,107.3 31.5,108.3 73.2,112.85 41.75,113.25 41,114.75 72.95,115.55 40.25,116.25 44,116.4 45.3,119.4 53.7,119.4 83.1,121.5 31.3,122.3 37.5,122.4 42.2,123.7 78.5,123.7 80.8,123.7 83.1,123.7
  other v2: 49.2,92.2 50,93.1 67.5,98.7 47.9,99.8 62.3,111.8 60.8,113.5 53.9,116.1 56.7,116.7
  other v3: 62.5,122.3
IN1: R12.1 U1.16 | length 8.8
  Top Layer w0.254: R12.1@48.675,90.7 50.975,93 50.975,93.922 U1.16
IN2: R16.1 U1.20 | length 13.4
  Top Layer w0.254: R16.1 51.95,92.4 53.5,92.4 55.1,94 57.1,94 58.634,95.534 58.634,97.434 U1.20
IN3: R18.1 U1.26 | length 16
  Top Layer w0.254: R18.1 53.1,91.8 53.9,91.8 55.4,93.3 57.4,93.3 61.6,97.5 61.6,98.711 U1.26
IN4: R19.1 U1.29 | length 16.6
  Top Layer w0.254: R19.1 55.65,92.6 57.5,92.6 62.8,97.9 62.8,100.1 62.4,100.5 61.932,100.5 U1.29
IN5: R20.1 U1.30 | length 15.9
  Top Layer w0.254: R20.1 56.7,91.9 57.6,91.9 63.3,97.6 63.3,100.3 62.6,101 62.139,101 U1.30
IN6: R22.1 U1.31 | length 15.3
  Top Layer w0.254: R22.1 63.8,97.25 63.8,100.5 62.896,101.404 62.442,101.404 U1.31
IN7: R23.1 U1.37 | length 19
  Top Layer w0.254: R23.1@59,90.7 59,91.4 v1(60.9,93.3) ; v1(60.4,102.9) 60.4,103.4 59.975,103.825 59.975,105.75 U1.37
  Bottom Layer w0.254: v1@60.4,102.9 60.4,100 58.175,97.775 58.175,96.025 v1(60.9,93.3)
LED1: R10.1 U1.48 | length 8.4
  Top Layer w0.254: U1.48 58.5,112.053 R10.1
LED2: R11.1 U1.47 | length 9.7
  Top Layer w0.254: U1.47 59.1,111.946 59.1,116.7 R11.1@60.6,118.2
LED3: R37.2 U1.44 | length 11.2
  Top Layer w0.254: U1.44 59.7,110.425 59.7,115.7 62.05,118.05 R37.2
MISO: R26.7 R36.7 U1.27 | length 20.2
  Top Layer w0.254: U1.27 62.118,98.9 v1(62.2,98.9) ; v2(66.2,96.1) 66.2,99 67,99.8 67,104.8 68.1,105.9 R36.7
  Bottom Layer w0.254: v1(62.2,98.9) 65.1,96 66.2,96 66.4,96.2 R26.7 R26.7@67.2,96.2
MOSI: R26.6 R36.6 U1.22 | length 25.2
  Top Layer w0.254: U1.22 58.541,98.908 59.6,97.849 59.6,97.8 59.623,97.777 59.623,97.723 60,97.346 v1(60,97.3) ; v2(65.6,94.5) 65.6,99.4 66.4,100.2 66.4,105.3 67.9,106.8 68.7,106.8 R36.6
  Bottom Layer w0.254: v1(60,97.3) 63,94.3 65.4,94.3 v2(65.6,94.5) 66.5,95.4 R26.6
NetC18_2: C18.2 R3.1 | length 1.5
  Top Layer w0.254: C18.2@42.55,102.7 R3.1@42.55,104.2
NetC21_2: C21.2 GPS.1 J1.1 | length 4.6
  Top Layer w0.635: GPS.1 35.75,100 C21.2 ; C21.2@37.775,100.05 J1.1 J1.1@39.75,99.975
NetC24_2: C24.2 U3.10 | length 5.4
  Top Layer w0.254: C24.2@73.1,98.6 75.6,98.6 76.725,99.725 U3.10
NetC25_2: C25.2 U3.20 | length 5.1
  Top Layer w0.254: C25.2 74.55,107.3 76.1,107.3 77.225,106.175 U3.20
NetC36_2: C36.2 U8.5 | length 1.7
  Top Layer w0.508: U8.5 C36.2@76.75,94.2
NetD1_2: D1.2 R1.2 | length 2.1
  Top Layer w0.254: D1.2 34,84.077 R1.2
NetD2_2: D2.2 R10.2 | length 1.8
  Top Layer w0.254: D2.2 57.5,120.55 R10.2@58.375,119.675
NetD3_2: D3.2 R11.2 | length 1.7
  Top Layer w0.254: D3.2 60.6,120.5 R11.2@60.6,119.6
NetD4_1: D4.1 R34.1 USB.1 | length 9.2
  Bottom Layer w0.381: USB.1@34.758,113.698 35.75,112.706 35.75,110.75 38,108.5 D4.1
  Bottom Layer w0.635: R34.1 D4.1@37.3,108.1
NetGPIO_3: GPIO.3 R12.2 | length 5
  Top Layer w0.508: GPIO.3 46.97,89.25 R12.2@48.5,89.25
NetGPIO_6: GPIO.6 R16.2 | length 4.2
  Top Layer w0.508: GPIO.6 48.51,88.25 49.25,88.25 R16.2@50.25,89.25
NetGPIO_9: GPIO.9 R18.2 | length 3.4
  Top Layer w0.508: GPIO.9 R18.2@52,89.2
NetGPIO_12: GPIO.12 R19.2 | length 3.2
  Top Layer w0.508: GPIO.12 53.75,88.41 R19.2
NetGPIO_15: GPIO.15 R20.2 | length 2.9
  Top Layer w0.508: GPIO.15 55.5,87.62 R20.2
NetGPIO_18: GPIO.18 R22.2 | length 2.5
  Top Layer w0.508: GPIO.18 R22.2@57.2,89.25
NetGPIO_21: GPIO.21 R23.2 | length 2.8
  Top Layer w0.508: R23.2@59,89.3 59,87.52 GPIO.21
NetMOTORS_3: MOTORS.3 R9.2 | length 2.9
  Top Layer w0.508: R9.2 62,87.58 MOTORS.3
NetMOTORS_6: MOTORS.6 R13.2 | length 3.2
  Top Layer w0.508: R13.2 63.75,88.37 MOTORS.6
NetMOTORS_9: MOTORS.9 R17.2 | length 3.5
  Top Layer w0.508: R17.2 65.5,89.16 MOTORS.9
NetMOTORS_12: MOTORS.12 R21.2 | length 4.2
  Top Layer w0.508: R21.2 67.9,89.3 MOTORS.12
NetQ1_1: Q1.1 R33.1 | length 8.8
  Bottom Layer w0.254: Q1.1 33.425,121.775 38.7,116.5 R33.1
NetR26_1: R26.1 U10.5 | length 19.9
  Top Layer w0.254: v1(79.7,88.2) 80.65,87.25 U10.5
  Bottom Layer w0.254: R26.1 70.825,97 72.725,95.1 78.4,95.1 79.7,93.8 v1(79.7,88.2)
NetR26_2: R26.2 U10.6 | length 20
  Top Layer w0.254: v1(79.5,87.3) 80.8,86 U10.6
  Bottom Layer w0.254: R26.2 70.15,96.2 71.95,94.4 77.8,94.4 78.9,93.3 78.9,87.9 v1(79.5,87.3)
NetR26_3: R26.3 U10.7 | length 20.1
  Top Layer w0.254: v1(79.6,86.1) 80.95,84.75 U10.7
  Bottom Layer w0.254: R26.3 69.4,95.4 71.2,93.6 77.3,93.6 78.1,92.8 78.1,87.6 v1(79.6,86.1)
NetR26_4: R26.4 U10.8 | length 20.5
  Top Layer w0.254: v1(79.5,85.1) 79.5,84.5 80.5,83.5 U10.8
  Bottom Layer w0.254: R26.4 68.75,94.6 70.35,93 76.6,93 77.3,92.3 77.3,87.3 v1(79.5,85.1)
NetR29_1: R29.1 R31.1 USB.2 | length 4.7
  Top Layer w0.254: v2(36.25,114) R29.1 R31.1
  Bottom Layer w0.254: USB.2@34.775,114.35 35.9,114.35 v2(36.25,114)
NetR30_1: R30.1 R32.1 R33.2 USB.3 | length 7
  Bottom Layer w0.254: USB.3@34.775,115 36.4,115 R33.2 R30.1 R32.1
NetR36_1: R36.1 U3.8 | length 10.7
  Top Layer w0.254: R36.1 70.6,105.1 72,103.7 v2(72,100) ; v2(74.3,100) 75.5,100 75.725,100.225 U3.8
  Bottom Layer w0.254: v2(72,100) v2(74.3,100)
NetR36_2: R36.2 U3.9 | length 12.1
  Top Layer w0.254: R36.2 70.9,105.9 72.6,104.2 72.6,100.7 74,99.3 75.5,99.3 76.225,100.025 U3.9
NetR36_3: R36.3 U3.24 | length 5.7
  Top Layer w0.254: R36.3 71.225,106.7 72.25,105.675 74.525,105.675 U3.24
NetR36_4: R36.4 U3.23 | length 7
  Top Layer w0.254: R36.4 71.675,107.5 72.675,106.5 75,106.5 75.725,105.775 U3.23
NetR37_1: R37.1 SWITCH.2 | length 4.1
  Top Layer w0.254: R37.1 62.5,120.5 v2(63.1,121.1)
  Bottom Layer w0.254: v2(63.1,121.1) 63.4,121.1 64.325,120.175 SWITCH.2
NRST: C10.2 JTAG.1 R4.1 SW1.3 U1.39 | length 31
  Top Layer w0.254: U1.39 60.586,107.775 64.275,107.775 64.85,108.35 64.85,110.95 66.3,112.4 67.3,112.4 69.25,114.35 SW1.3 77.6,116.9 77.95,116.55 C10.2 ; R4.1 C10.2 ; JTAG.1@79.95,118.5 JTAG.1 80.25,118.3 C10.2
PLLRC: C17.2 R3.2 U1.63 | length 9.6
  Top Layer w0.254: R3.2@43.95,104.2 C17.2@43.95,105.7 ; R3.2 44.85,103.6 49.35,103.6 50,104.25 50,104.654 U1.63
PULLUP: Q1.3 U1.10 | length 40.7
  Top Layer w0.254: v2(50.7,98.2) 51.011,98.2 U1.10
  Bottom Layer w0.254: Q1.3 41.15,123.45 43.1,121.5 43.1,112.8 40.7,110.4 40.7,106.8 44.3,103.2 47.6,103.2 51.1,99.7 51.1,98.6 v2(50.7,98.2)
PWM0: R9.1 U1.15 | length 11.9
  Top Layer w0.254: U1.15 54.546,98.2 55.1,98.2 55.6,97.7 55.6,97.2 v1(57,95.8) ; v1(60.95,91.9) 60.95,91.75 R9.1
  Bottom Layer w0.254: v1(57,95.8) 57.05,95.8 v1(60.95,91.9)
PWM1: R13.1 U1.23 | length 13.1
  Top Layer w0.254: U1.23 59.939,98.25 v1(60.125,98.25) ; v1(63.662,96) 63.6,96 62.1,94.5 62.1,92.35 R13.1
  Bottom Layer w0.254: v1(60.125,98.25) 60.375,98.5 61.4,98.5 63.662,96.238 v1(63.662,96)
PWM2: R17.1 U1.25 | length 12.5
  Top Layer w0.254: U1.25 60.9,98.704 v1(60.9,97.8) ; v1(63.6,95.1) 62.9,94.4 62.9,93.05 65.25,90.7 R17.1
  Bottom Layer w0.254: v1(60.9,97.8) v1(63.6,95.1)
PWM3: R21.1 U1.32 | length 14.4
  Top Layer w0.254: U1.32 62.653,101.9 63.2,101.9 64.35,100.75 64.35,93.25 66.9,90.7 R21.1
RXD0: U1.35 XBEE.2 | length 26.5
  Top Layer w0.254: U1.35 62.339,106.7 64.1,106.7 v1(64.3,106.5)
  Bottom Layer w0.254: XBEE.2 50.1,113.65 53.25,110.5 58.4,110.5 62.4,106.5 v1(64.3,106.5)
RXD1: GPS.3 U1.11 | length 23.5
  Top Layer w0.254: v5(33.85,97.15) GPS.3 ; v1(49.95,95.75) 51.4,97.2 51.4,97.882 U1.11
  Bottom Layer w0.254: v5(33.85,97.15) 34.375,96.625 37.125,96.625 38,95.75 39.5,95.75 40.75,97 47.2,97 48.45,95.75 v1(49.95,95.75)
SCL: COMPASS.3 R14.1 U1.36 U5.6 | length 36.8
  Top Layer w0.254: COMPASS.3 50.15,118.85 v1(51,118) ; U1.36 62.132,107.2 v2(65.2,107.2) 65.47,107.47 U5.6@65.47,109.078 ; U5.6 65.47,110.27 66.8,111.6 R14.1
  Bottom Layer w0.254: v1(51,118) 51.7,117.3 51.7,114.05 53.5,112.25 59.75,112.25 61.25,110.75 61.25,108.75 62.8,107.2 v2(65.2,107.2)
SDA: COMPASS.2 R15.1 U1.43 U5.5 | length 26.2
  Top Layer w0.254: COMPASS.2 48.9,118.6 50.7,116.8 v1(50.9,116.8) ; U1.43 59.732,109.75 v2(60.5,109.75) ; R15.1 61.3,110.55 v2(60.5,109.75) ; U5.5 63.55,109.75 v2(60.5,109.75)
  Bottom Layer w0.254: v1(50.9,116.8) 50.9,113.85 53.25,111.5 59.5,111.5 60.5,110.5 v2(60.5,109.75)
SPCK: R26.5 R36.5 U1.21 | length 28.3
  Top Layer w0.254: U1.21 59.225,97.55 v1@59.225,96.325 ; v1@64.925,93.675 64.925,99.725 65.8,100.6 65.8,105.8 67.5,107.5 R36.5
  Bottom Layer w0.254: v1@59.4,96.4 62.2,93.6 v1(65,93.6) 65.85,93.6 66.85,94.6 R26.5@67.2,94.6
  other v1: 59.35,96.325
TCK: JTAG.4 R7.1 U1.53 | length 37
  Top Layer w0.254: U1.53 53.5,108.225 54.075,108.225 v1@54.5,107.8 ; R7.1 79.37,110 JTAG.4
  Bottom Layer w0.254: v1(54.6,107.6) 55.2,108.2 57.8,108.2 64,102 67.15,102 76.03,110.88 JTAG.4
TDI: JTAG.2 R5.1 U1.33 | length 28.5
  Top Layer w0.254: U1.33@62.076,104.924 v1(64.25,102.75) ; R5.1 80.25,115.3 JTAG.2
  Bottom Layer w0.254: v1(64.25,102.75) 67,102.75 75.5,111.25 75.54,111.25 JTAG.2
TDO: JTAG.8 U1.49 | length 42.2
  Top Layer w0.254: v1(52.5,114.25) 52.4,114.15 52.4,112.153 U1.49 ; v1(72.75,110.75) 75.1,108.4 80.8,108.4 82.79,110.39 JTAG.8
  Bottom Layer w0.254: v1(52.5,114.25) 53.75,113 60,113 62,111 62,109 63,108 70,108 v1(72.75,110.75)
TMS: JTAG.3 R6.1 U1.51 | length 46.1
  Top Layer w0.254: v1(51.575,109.925) 51.625,109.925 52,110.3 52.839,110.3 U1.51 ; v2(74,110.75) 75.75,109 80.4,109 81.5,110.1 81.5,112.17 JTAG.3 78.33,111.5 R6.1
  Bottom Layer w0.254: v1(51.575,109.925) 52.5,109 58,109 63.5,103.5 66.75,103.5 v2(74,110.75)
TST: R8.2 U1.40 | length 9.6
  Top Layer w0.254: R8.2@55.75,112.4 55.75,107.45 56.7,106.5 58.604,106.5 U1.40
TXD0: U1.34 XBEE.3 | length 27.7
  Top Layer w0.254: U1.34 62.446,106.1 63.4,106.1 v1(64.2,105.3)
  Bottom Layer w0.254: XBEE.3 48.85,117.913 49.5,117.263 49.5,113.25 53,109.75 58.25,109.75 62.7,105.3 v1(64.2,105.3)
TXD1: GPS.2 U1.14 | length 27.2
  Top Layer w0.254: v5(32.75,97.25) 33.9,98.4 GPS.2 ; v1(50.8,95.4) 51.039,95.4 U1.14
  Bottom Layer w0.254: v5(32.75,97.25) 32.75,97 33.75,96 36.75,96 37.75,95 40,95 41.25,96.25 46.95,96.25 48.2,95 50.4,95 v1(50.8,95.4)
"VBUS MON": R34.2 R35.2 U1.9 | length 21.7
  Top Layer w0.254: v1(50.2,99) 51.104,99 U1.9
  Bottom Layer w0.254: R35.2@33.55,106.7 R35.2 R34.2 36,106 40.5,106 47.5,99 v1(50.2,99)
VDDOUT: C4.2 C5.2 C6.2 C13.2 C14.2 C20.2 U1.8 U1.12 U1.24 U1.54 U1.64 | length 41
  Top Layer w0.254: v1(41.4,107.1) C13.2@41.4,107.864 ; C20.2 v1(48.3,104.5) 48.401,104.5 U1.64 ; U1.8 52.296,100.9 v1(52.845,100.9) 53.985,99.76 ; U1.54 53.418,107.6 v1(53.7,107.6) ; U1.12 53.985,99.76 ; v1@57.7,101.3 56.29,101.3 v1(54.75,99.76) 53.985,99.76 ; v1(57.745,101.255) 57.745,101.151 U1.24
  Bottom Layer w0.254: v1(41.4,107.1) 44,104.5 v1(48.3,104.5) 49.4,103.4 50.6,103.4 ; v1(52.845,100.9) 52.845,101.855 C14.2@53.045,102.055 ; C14.2 C14.2@53.045,102.055 ; C6.2@55.61,106.9 54.2,106.9 53.7,107.4 v1(53.7,107.6) 53.3,107.6 50.6,104.9 50.6,103.5 52.045,102.055 C14.2@53.045,102.055 ; v1(57.745,101.255) C5.2
VIN: GPIO.2 GPIO.5 GPIO.8 GPIO.11 GPIO.14 GPIO.17 GPIO.20 L7.1 L8.1 MOTORS.2 MOTORS.5 MOTORS.8 MOTORS.11 | length 66.4
  Top Layer w0.889: MOTORS.11 MOTORS.11@70.49,84.24 ; 72,87.55 L8.1
  Top Layer w0.94: 72,85.75 72,87.55
  Top Layer w1.016: L7.1 41.3,92 41.3,88.45 ; MOTORS.11@70.49,84.24 72,85.75
  Top Layer w1.143: 41.3,88.45 43,86.75 43,85.74 GPIO.2 GPIO.5 GPIO.8 GPIO.11 GPIO.14 GPIO.17 GPIO.20 MOTORS.2 MOTORS.5 MOTORS.8 MOTORS.11
  Bottom Layer w1.143: GPIO.2 GPIO.5 GPIO.8 GPIO.11 GPIO.14 GPIO.17 GPIO.20 MOTORS.2 MOTORS.5 MOTORS.8 MOTORS.11
XIN: C15.2 U1.62 X1.1 | length 6.5
  Top Layer w0.254: X1.1 44.7,108.25 C15.2 47.38,106.43 48.93,106.43 U1.62
XOUT: C16.2 U1.61 X1.3 | length 6.2
  Top Layer w0.254: X1.3 47.05,109.95 48.425,108.575 49.475,108.575 49.2,108.3 49.2,106.868 U1.61
pads on no net: ADC.0 ADC.5 COMPASS.0 COMPASS.5 GPS.0 GPS.5 GPS.7 JTAG.6 SW1.1 SW1.4 SWITCH.0 SWITCH.5 U1.13 U1.19 U1.38 U1.52 U3.2 U3.3 U3.4 U3.5 U3.7 U3.12 U3.14 U3.15 U3.16 U3.17 U3.19 U3.21 U3.22 U5.7 U10.4 USB.4 USB.6 USB.18 USB.19 XBEE.0 XBEE.5

## Polygon pours and split planes (outlines as drawn)
GND on Top Layer "Bottom Layer-No Net" (solid, remove dead copper, pour order 14): 30,125 85,125 85,80 30,80
AGND on Top Layer "Bottom Layer-No Net" (solid, remove dead copper, pour order 16): 85,107.9 74,107.9 69.6,103.5 69.6,101.6 71.7,99.5 71.7,97 74,94.7 74,87.977 74,87.9 72.8,86.7 72.8,80 85,80
A3V3 on Top Layer "Bottom Layer-No Net" (solid, remove dead copper, pour order 13): 74,92.75 76.75,92.75 77,92.75 77.5,92.273 77.5,87.977 77,87.5 74.75,87.5 74.5,87.5 74,87.977
3.3V on Top Layer "Bottom Layer-No Net" (solid, remove dead copper, pour order 12): 43.75,101.75 43.75,94.25 42,92.5 42,90 42,89.75 43.5,88.25 48.51,88.25 48.51,94.24 47,95.75 47,101.25 46.5,101.75
5VB on Top Layer "Bottom Layer-No Net" (solid, remove dead copper, pour order 11): 43.5,94.25 42.5,93.25 38,93.25 38,97.5 38,98.25 39,99.25 43.5,99.25
5VA on Top Layer "Bottom Layer-No Net" (solid, remove dead copper, pour order 9): 73.5,89 73.5,94.75 71.5,94.75 71.5,92.833 70.75,92.115 69.25,92.115 68.5,92.833 66.25,92.833 66.25,89
AGND on Bottom Layer "Bottom Layer-No Net" (solid, remove dead copper, pour order 15): 85,107.9 74.1,107.9 74,107.9 69.6,103.5 69.6,101.6 71.7,99.5 71.7,97 74,94.7 74,87.9 72.8,86.7 72.8,80 85,80
GND on Bottom Layer "Bottom Layer-No Net" (solid, remove dead copper, pour order 21): 30,125 85,125 85,80 30,80
no net on VCC (split plane): 78.749,100.751 74.251,100.751 74.251,105.249 78.749,105.249
A3V3 on VCC (split plane): 84.49,89.651 79.55,89.651 79.511,89.646 79.474,89.631 79.443,89.607 79.336,89.5 78.125,89.5 78.125,88.289 77.918,88.082 77.894,88.051 77.879,88.014 77.874,87.975 77.874,80.51 72.776,80.51 72.776,86.643 73.109,86.975 73.132,86.993 73.957,87.818 73.981,87.849 73.987,87.864 73.996,87.886 74.001,87.925 74.001,94.65 73.996,94.689 73.985,94.715 73.981,94.726 73.957,94.757 71.726,96.988 71.726,99.425 71.721,99.464 71.706,99.501 71.682,99.532 69.626,101.588 69.626,103.512 74.038,107.924 84.49,107.924
3.3V on VCC (split plane): 84.49,108.226 73.975,108.226 73.936,108.221 73.899,108.206 73.868,108.182 69.368,103.682 69.344,103.651 69.329,103.614 69.324,103.575 69.324,101.525 69.329,101.486 69.344,101.449 69.368,101.418 71.424,99.362 71.424,96.925 71.429,96.886 71.444,96.849 71.468,96.818 73.699,94.587 73.699,87.988 72.936,87.225 72.913,87.207 72.518,86.812 72.494,86.781 72.479,86.745 72.474,86.705 72.474,80.51 30.51,80.51 30.51,124.49 84.49,124.49
no net on GND (split plane): 78.749,100.751 74.251,100.751 74.251,105.249 78.749,105.249
AGND on GND (split plane): 84.49,89.651 79.625,89.651 79.586,89.646 79.56,89.635 79.549,89.631 79.518,89.607 79.361,89.45 78.05,89.45 78.05,88.139 77.893,87.982 77.869,87.951 77.854,87.914 77.849,87.875 77.849,80.51 72.779,80.51 72.776,80.513 72.776,86.662 73.932,87.818 73.956,87.849 73.971,87.886 73.976,87.925 73.976,94.775 73.971,94.814 73.962,94.836 73.956,94.851 73.932,94.882 71.726,97.088 71.726,99.425 71.721,99.464 71.706,99.501 71.682,99.532 69.601,101.613 69.601,103.512 74.013,107.924 84.49,107.924
GND on GND (split plane): 84.49,108.226 73.95,108.226 73.911,108.221 73.874,108.206 73.843,108.182 69.343,103.682 69.319,103.651 69.304,103.614 69.299,103.575 69.299,101.55 69.304,101.511 69.319,101.474 69.343,101.443 71.424,99.362 71.424,97.025 71.429,96.986 71.444,96.949 71.468,96.918 73.674,94.712 73.674,87.988 72.518,86.832 72.494,86.801 72.479,86.764 72.474,86.725 72.474,80.51 30.51,80.51 30.51,124.49 84.49,124.49

## Keep-outs
Keep-Out Layer:
  pour cut-out: 74.8,104.7 78.2,104.7 78.2,101.3 74.8,101.3
  pour cut-out: 85,80 85,89.4 79.7,89.4 78,87.9 78,80
  pour cut-out: 43.6,110.9 47.8,110.9 47.806,107.294 43.6,107.3

## Other copper
Top Layer:
  text "AutoPilot V3.4" at 30.9,123.5 h0.76
VCC (plane layer: these items are gaps in the copper):
  rectangle: 74.55,101.15 78.375,104.95
  rectangle: 78.125,80.35 84.725,89.5
  rectangle: 43.6,107.294 47.6,110.9
  lines w0.3: 72.625,80 72.625,86.705 73.02,87.1 73.025,87.1 73.85,87.925 73.85,94.65 71.575,96.925 71.575,99.425 69.475,101.525 69.475,103.575 73.975,108.075 85,108.075 ; 78.025,80 78.025,87.975 79.55,89.5 84.7,89.5 85,89.8 ; 74.1,100.6 74.1,105.4 78.9,105.4 78.9,100.6 74.1,100.6
GND (plane layer: these items are gaps in the copper):
  rectangle: 74.55,101.15 78.375,104.95
  rectangle: 78.05,80.3 84.65,89.45
  rectangle: 43.675,107.297 47.6,110.9
  lines w0.3: 78,80.025 78,87.875 79.625,89.5 84.725,89.5 85,89.775 ; 85,80 73.075,80 72.625,80.45 72.625,86.725 73.825,87.925 73.825,94.775 71.575,97.025 71.575,99.425 69.45,101.55 69.45,103.575 73.95,108.075 85,108.075 ; 85,103.125 85,103.4 ; 74.1,100.6 74.1,105.4 78.9,105.4 78.9,100.6 74.1,100.6

## Silkscreen, mask and mechanical layers (free items; w line width, h text height)
Top Overlay:
  lines w0.254: 42.774,84.667 cw(c40,85) 42.779,84.71 ; 42.774,119.667 cw(c40,120) 42.779,119.71 ; 77.774,84.667 cw(c75,85) 77.779,84.71 ; 77.774,119.667 cw(c75,120) 77.779,119.71
Mechanical 1:
  the board outline again, w0.3